# Altium PCB PCB.pcbdoc
Units mil, origin at the board's own origin, x right, y up, seen from the top; angles counter-clockwise.
Board outline 4080.9 x 3545.11 mil, 2 copper layers (Top Layer, Bottom Layer); 21 components, 67 nets, 165 pads, 18 vias.
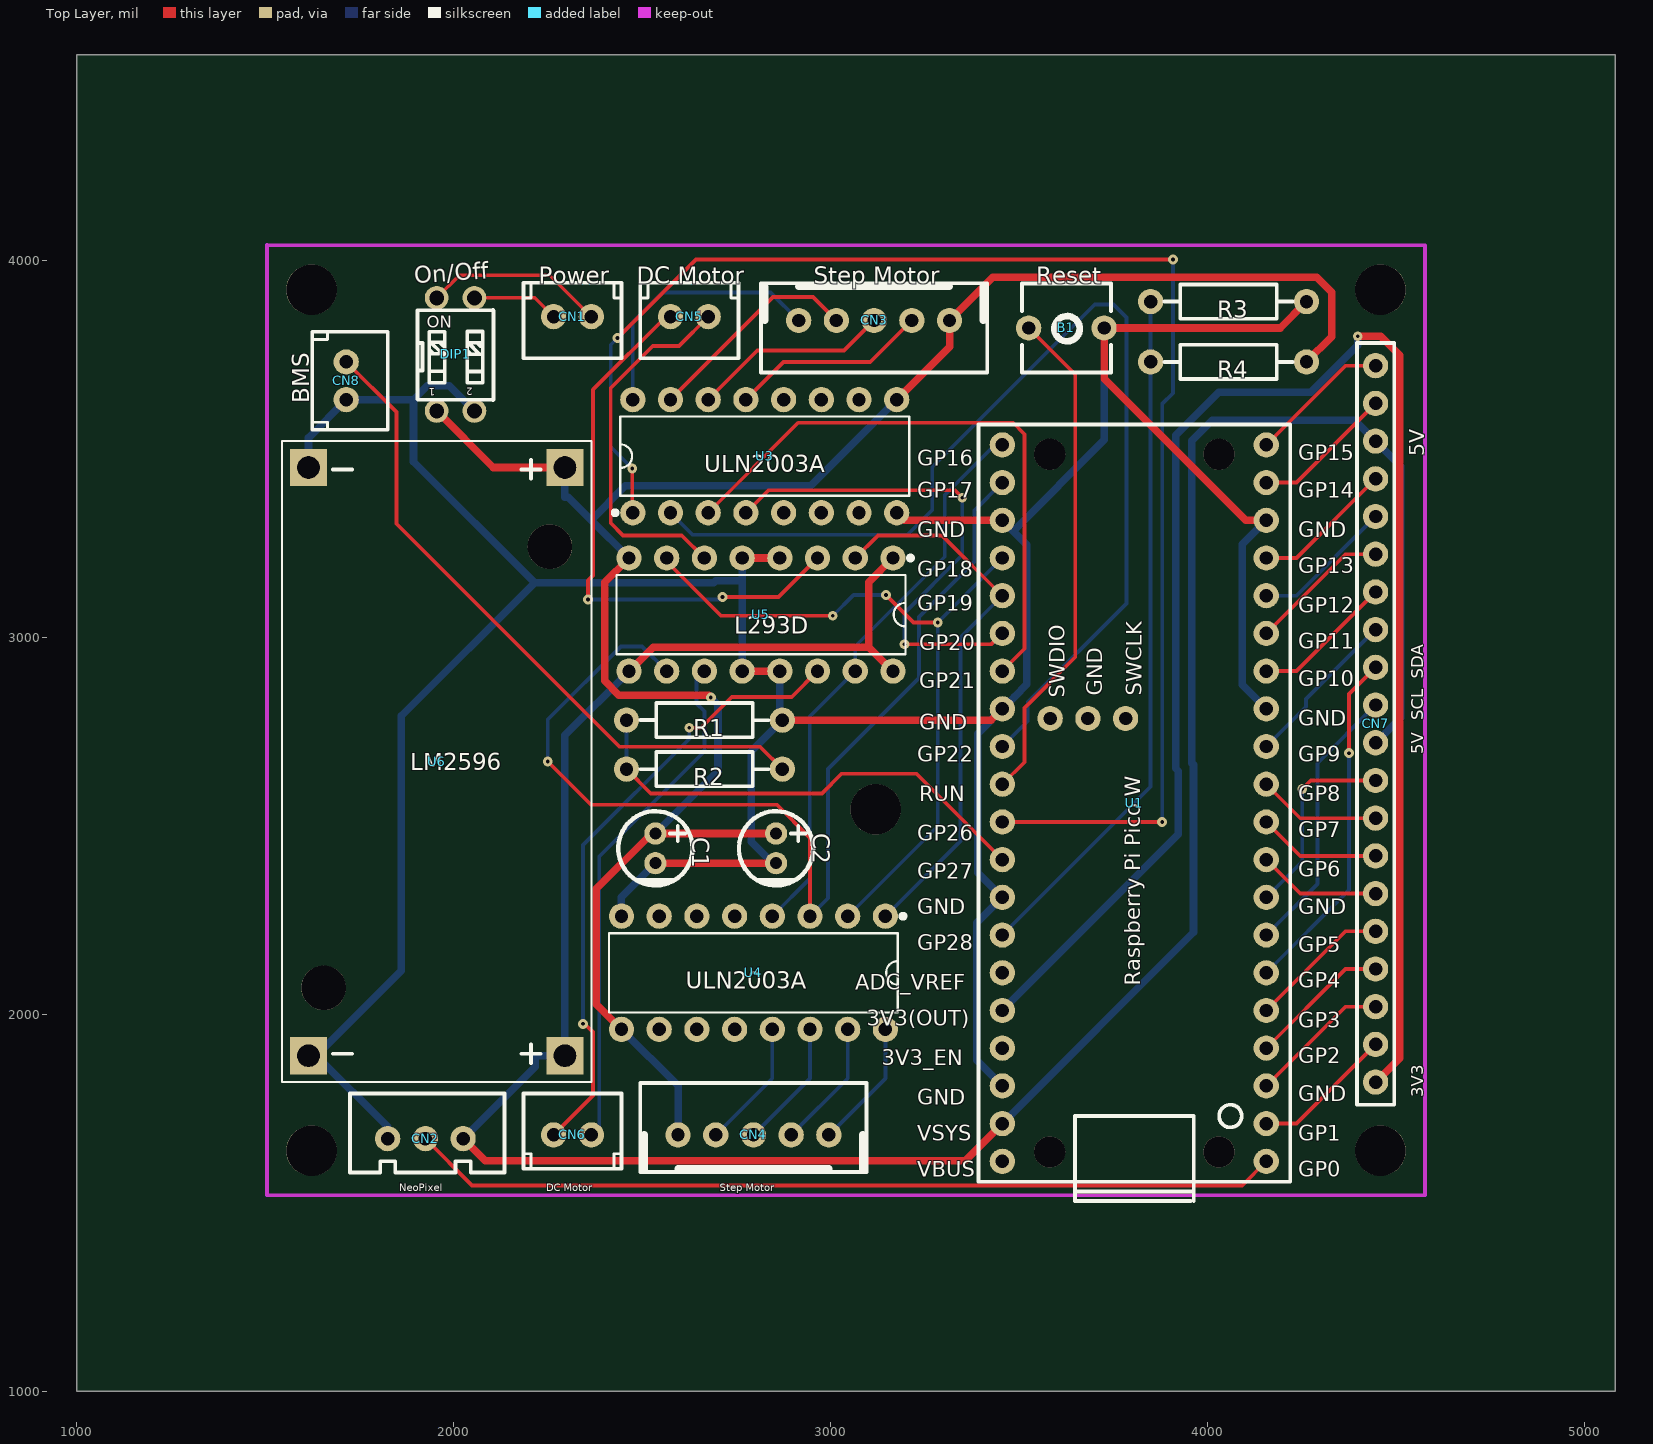
[diagram p0: Top Layer view]
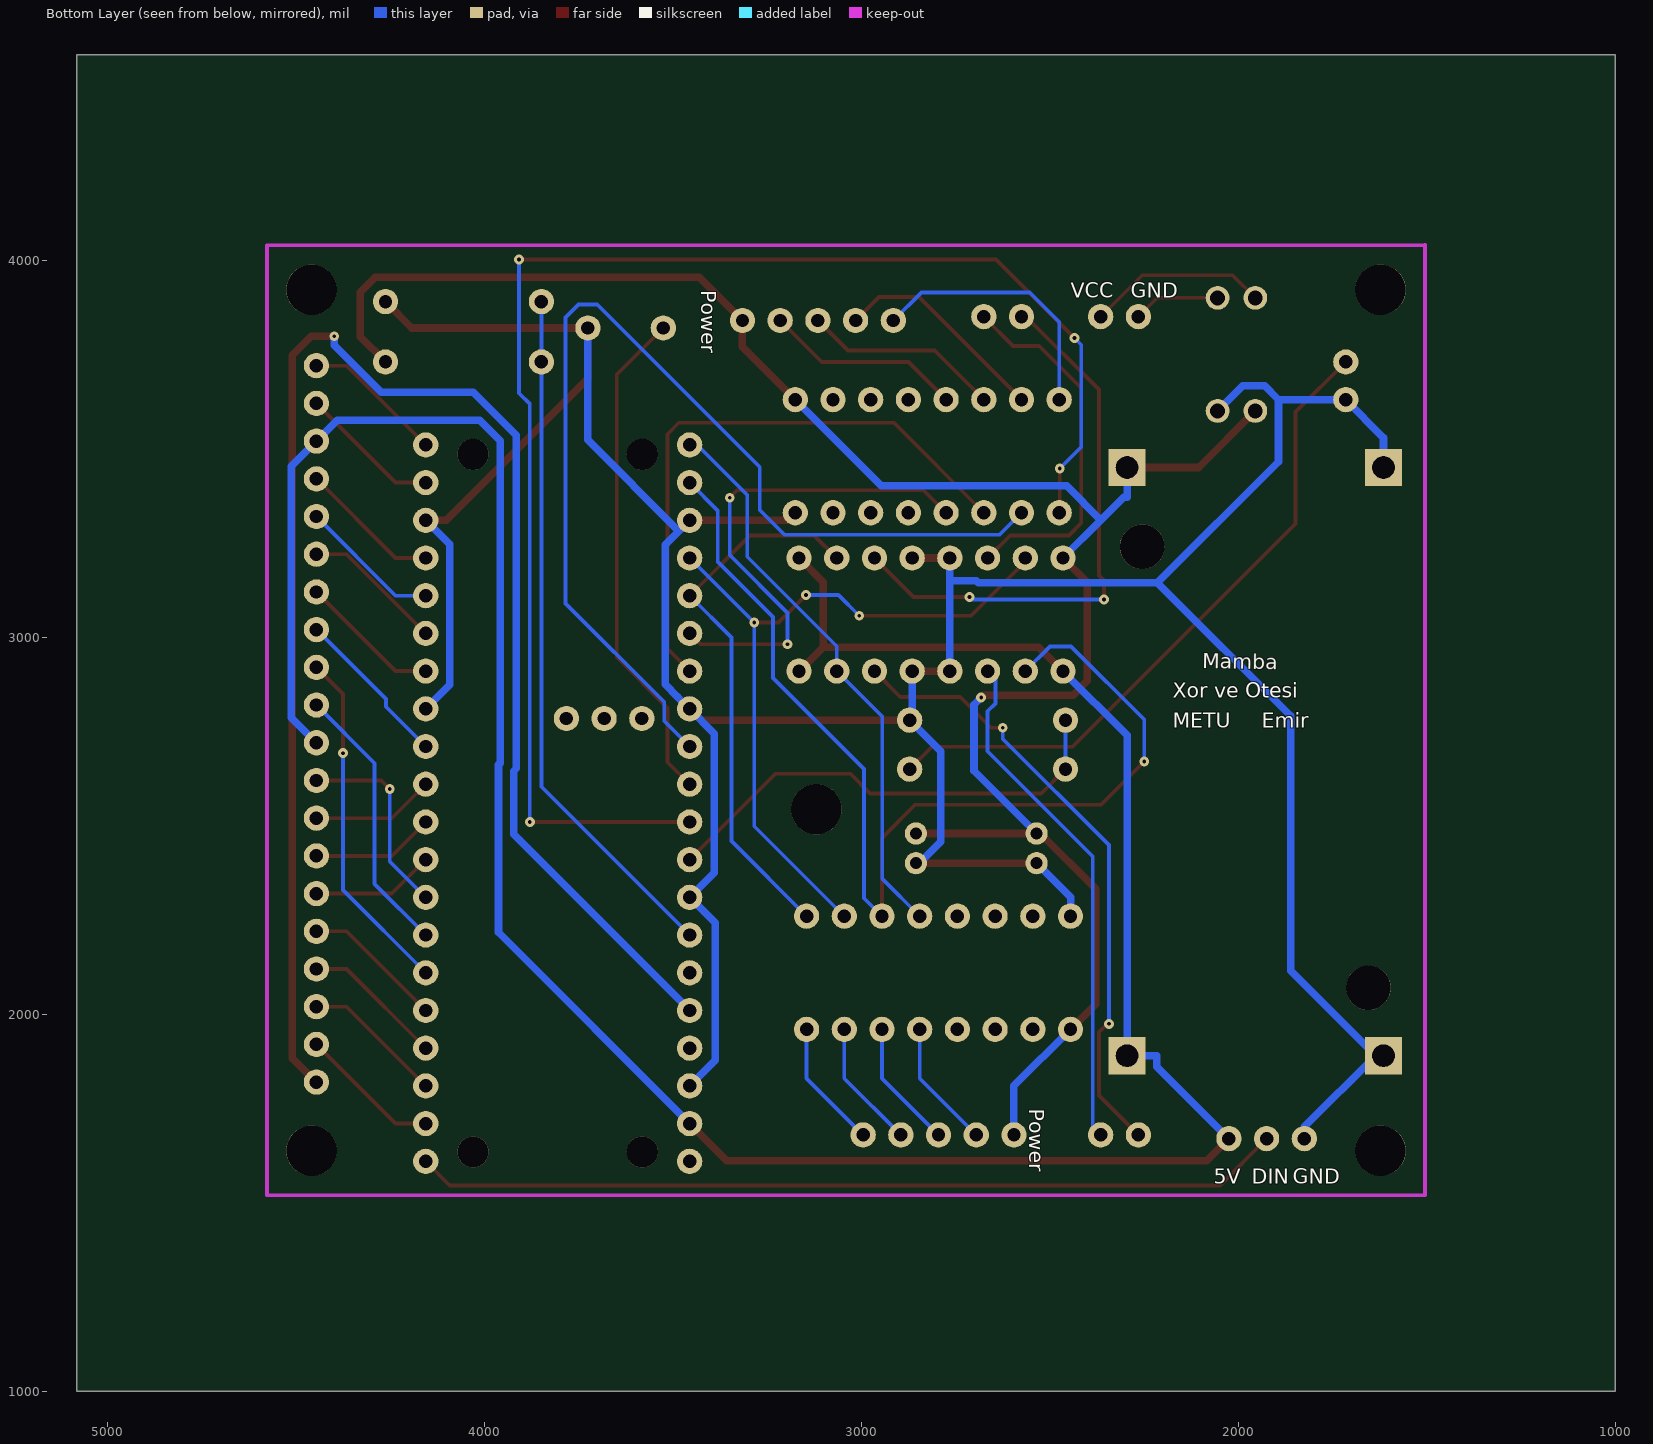
[diagram p1: Bottom Layer view, seen from below]

## Layer stack, top to bottom
Top Layer: signal copper (thickness not stored)
Dielectric: dielectric 12.6, FR-4, Dk 4.8
Bottom Layer: signal copper (thickness not stored)

## Board outline
5080.9,1000 1000,1000 1000,4545.11 5080.9,4545.11

## Components (designator, comment, footprint, x,y, rotation, side; value= is the part's Value field where it differs from the comment)
B1 "Reset" "BUTTON 2PIN" 3625,3820.11 r0 top
C1 "10uF" 10UF_16V 2535,2440.12 r270 top
C2 "10uF" 10UF_16V 2855,2440.12 r270 top
CN1 "Power" JST-XH_2P-2.54MM 2265,3850.11 r270 top
CN2 "NeoPixel" JST-XH_3_JD 1975,1670.12 r270 top
CN3 "Step Motor" "JST 2.54MM 5PIN" 3115,3840.11 r270 top
CN4 "Step Motor" "JST 2.54MM 5PIN" 2795,1680.12 r90 top
CN5 "DC Motor" JST-XH_2P-2.54MM 2575,3850.11 r270 top
CN6 "DC Motor" JST-XH_2P-2.54MM 2365,1680.12 r90 top
CN7 "Female Header 2.54 1x20" HDR-TH_20P-P2.54-V-F 4444.99,2770.11 r270 top
CN8 "BMS" JST-XH_2P-2.54MM 1715,3630.11 r0 top
DIP1 "On/Off" "DIP SWITCH 2 SWITCHES" 2005,3750.11 r0 top
R1 "10kΩ" RES-TH_BD2.3-L6.5-P10.50-D0.5 2665,2780.11 r180 top
R2 "20kΩ" RES-TH_BD2.3-L6.5-P10.50-D0.5 2665,2650.12 r0 top
R3 "10kΩ" RES-TH_BD2.3-L6.5-P10.50-D0.5 4054.99,3890.11 r180 top
R4 "20kΩ" RES-TH_BD2.3-L6.5-P10.50-D0.5 4054.99,3730.11 r0 top
U1 "Raspberry Pi Pico W" "RPI PICO-W" 3804.99,1610.12 r90 top
U3 "ULN2003A" DIP-16_L19.2-W6.6-P2.54-LS7.6-BL 2825,3480.11 r0 top
U4 "ULN2003A" DIP-16_L19.2-W6.6-P2.54-LS7.6-BL 2795,2110.12 r180 top
U5 "L293D" DIP-16_L19.2-W6.6-P2.54-LS7.6-BL 2815,3060.11 r180 top
U6 "LM2596" DC-DC-STEP-DOWN-LM2596 1955,2670.12 r270 top

## Footprints (in the part's own frame and the unit in brackets; to place one, negate y for a bottom-side part, rotate by r counter-clockwise, add the part's x,y. Pads: shape width x height; smd on the part's side, far side on the other; paste and mask are expansions set on the pad)
10UF_16V [mm]
  round 1.5 hole 0.8 paste+0 mask+0.102: 1(-1,0) 2(1,0)
  silkscreen extent -2.5,-2.5 2.56,2.5
"BUTTON 2PIN" [mm]
  round 1.7 hole 0.9 paste+0 mask+0.051: 1(-2.54,0) 2(2.54,0)
  silkscreen extent -3,-3 3,3
DC-DC-STEP-DOWN-LM2596 [mil]
  rect 98.42x98.42 hole 59.06 paste+0 mask+2: IN+(-780,340) IN-(-780,-340) OUT+(780,340) OUT-(780,-340)
  round 118.1 hole 118.1 unplated paste+0: ""(-570,300) ""(600,-300)
  silkscreen extent -850,-410 850,410
"DIP SWITCH 2 SWITCHES" [mm]
  round 1.6 hole 1 paste+0 mask+0.102: 1(-1.27,-3.81) 7(1.27,3.81) 8(-1.27,3.81)
  round 1.6 hole 1 paste+0 mask+0.051: 2(1.27,-3.81)
  silkscreen extent -2.56,-3.06 2.55,2.99
DIP-16_L19.2-W6.6-P2.54-LS7.6-BL [mm]
  round 1.7 hole 0.9 paste+0 mask+0.051: 1(-8.89,-3.81) 2(-6.35,-3.81) 3(-3.81,-3.81) 4(-1.27,-3.81) 5(1.27,-3.81) 6(3.81,-3.81) 7(6.35,-3.81) 8(8.89,-3.81) 9(8.89,3.81) 10(6.35,3.81) 11(3.81,3.81) 12(1.27,3.81) 13(-1.27,3.81) 14(-3.81,3.81) 15(-6.35,3.81) 16(-8.89,3.81)
  silkscreen extent -10.22,-3.96 9.73,2.67
HDR-TH_20P-P2.54-V-F [mm]
  round 1.7 hole 0.9 paste+0 mask+0.051: 1(-24.13,0) 2(-21.59,0) 3(-19.05,0) 4(-16.51,0) 5(-13.97,0) 6(-11.43,0) 7(-8.89,0) 8(-6.35,0) 9(-3.81,0) 10(-1.27,0) 11(1.27,0) 12(3.81,0) 13(6.35,0) 14(8.89,0) 15(11.43,0) 16(13.97,0) 17(16.51,0) 18(19.05,0) 19(21.59,0) 20(24.13,0)
  silkscreen extent -25.65,-1.25 25.65,1.25
"JST 2.54MM 5PIN" [mm]
  round 1.7 hole 0.9 paste+0 mask+0.051: 1(0,5.08) 2(0,2.54) 3(0,0) 4(0,-2.54) 5(0,-5.08)
  silkscreen extent -2.5,-7.62 3.5,7.62
JST-XH_2P-2.54MM [mm]
  round 1.7 hole 0.9 paste+0 mask+0.102: 1(0,2.54) 2(0,0)
  silkscreen extent -2.29,-2.03 2.79,4.57
JST-XH_3_JD [mm]
  round 1.7 hole 0.9 paste+0 mask+0.102: 1(0,-3.81) 2(0,-1.27) 3(0,1.27)
  silkscreen extent -3.05,-6.35 2.29,4.06
RES-TH_BD2.3-L6.5-P10.50-D0.5 [mm]
  round 1.7 hole 0.9 paste+0 mask+0.051: 1(-5.25,0) 2(5.25,0)
  silkscreen extent -4.32,-1.15 4.32,1.15
"RPI PICO-W" [mm]
  round 1.7 hole 0.9 paste+0 mask+0.102: 1(0,-8.89) 2(2.54,-8.89) 3(5.08,-8.89) 4(7.62,-8.89) 5(10.16,-8.89) 6(12.7,-8.89) 7(15.24,-8.89) 8(17.78,-8.89) 9(20.32,-8.89) 10(22.86,-8.89) 11(25.4,-8.89) 12(27.94,-8.89) 13(30.48,-8.89) 14(33.02,-8.89) 15(35.56,-8.89) 16(38.1,-8.89) 17(40.64,-8.89) 18(43.18,-8.89) 19(45.72,-8.89) 20(48.26,-8.89) 21(48.26,8.89) 24(40.64,8.89) 30(25.4,8.89) 32(20.32,8.89) 37(7.62,8.89) 41(29.83,5.664) 42(29.83,3.124) 43(29.83,0.584)
  round 1.7 hole 0.9 paste+0 mask+0.051: 22(45.72,8.89) 23(43.18,8.89) 25(38.1,8.89) 26(35.56,8.89) 27(33.02,8.89) 28(30.48,8.89) 29(27.94,8.89) 31(22.86,8.89) 33(17.78,8.89) 34(15.24,8.89) 35(12.7,8.89) 36(10.16,8.89) 38(5.08,8.89) 39(2.54,8.89) 40(0,8.89)
  round 2.1 hole 2.1 unplated paste+0: ""(0.63,5.7) ""(0.63,-5.7) ""(47.63,-5.7) ""(47.63,5.7)
  silkscreen extent -2.67,-10.5 49.63,10.5

## Free pads (board coordinates)
  round 133.86 hole 133.86 unplated paste+0: ""(1623.11,1638.23) ""(1623.11,3921.69) ""(3119.17,2543.74) ""(4457.75,1638.23) ""(4457.75,3921.69)

## Via types
v1: diameter 25.98, hole 10, Top Layer to Bottom Layer, tented both sides, 18 vias

## Nets (pads, with @x,y where several pads share a name; then routed paths per layer and width w, separated by ;. In a path a pad name is that pad's centre, name@x,y a point inside that pad or via, vN(x,y) a via of type N, cw(c..) or ccw(c..) an arc to the next point about the centre after c; other vN are vias at no path point)
3V3: CN7.20 U1.36 | length 4414.5
  Top Layer w20: v1(4397.72,3798.48) 4458.06,3798.48 4508.8,3747.74 4508.8,1883.92 CN7.20
  Bottom Layer w20: U1.36 3921.96,2477.07 3921.96,2645.08 3914.48,2652.56 3914.48,3535.66 4028.48,3649.66 4273.16,3649.66 4397.72,3774.22 v1(4397.72,3798.48)
5VDC: CN2.3 CN7.3 CN7.11 U1.39 U5.1 U5.9 U5.16 U6.OUT+ | length 7389.7
  Top Layer w20: CN2.3 2083.32,1611.79 3356.68,1611.79 U1.39 ; U5.9 2528.86,2973.99 3101.12,2973.99 ; U5.16 3101.12,2973.99 ; U5.1 3101.12,3146.25 3101.12,2973.99
  Bottom Layer w20: CN2.3 2215.78,1860.89 2215.78,1890.12 U6.OUT+ 2295,2740.13 U5.9 ; U1.39 3962.03,2217.14 3962.03,2661.67 3957.32,2666.38 3957.32,3521.11 4011.37,3575.16 4389.94,3575.16 CN7.3 4511.14,3453.96 4511.14,2786.26 CN7.11
7.4V: C1.1 C2.1 CN3.1 CN4.1 DIP1.1 R4.2 U3.9 U4.9 U5.8 U6.IN+ | length 5588.4
  Top Layer w20: DIP1.1 2105,3450.12 U6.IN+ ; U4.9 2378.22,2026.9 2378.22,2332.52 2525.19,2479.49 C1.1 C2.1 ; U5.8 2400.5,3145.63 2400.5,2884.1 2438.13,2846.47 2675.9,2846.47 v1(2682.06,2840.31) ; U3.9 3315,3770.12 CN3.1 3429.77,3954.88 4288.58,3954.88 4328.27,3915.19 4328.27,3796.7 R4.2
  Bottom Layer w20: U6.IN+ 2295,3370.9 2304.21,3370.9 2364.34,3310.78 ; U4.9 2595,1810.12 CN4.1 ; U5.8 2364.34,3310.78 ; C1.1 2700.97,2645.46 2700.97,2821.4 v1(2682.06,2840.31) ; U3.9 2946.6,3401.72 2455.28,3401.72 2364.34,3310.78
ADC1: R1.2 R2.1 U1.32 | length 1269
  Top Layer w10: R2.1 2522.53,2585.89 2976.91,2585.89 3028.7,2637.68 3227.45,2637.68 U1.32
  Bottom Layer w10: R2.1 R1.2
ADC2: R3.2 R4.1 U1.34 | length 1842.9
  Bottom Layer w10: U1.34 3848.31,2603.42 R4.1 R3.2
DIP1_7: CN1.2 DIP1.7 | length 230.7
  Top Layer w10: DIP1.7 2214.99,3900.12 CN1.2
DIP1_8: CN1.1 DIP1.8 | length 480.4
  Top Layer w10: DIP1.8 2015.01,3960.13 2254.98,3960.13 CN1.1
GND: B1.2 C1.2 C2.2 CN2.1 CN8.2 DIP1.2 R1.1 R3.1 U1.13 U1.18 U1.23 U1.28 U1.33 U1.38 U3.8 U4.8 U5.4 U5.5 U5.12 U5.13 U6.IN- U6.OUT- | length 10189.9
  Top Layer w20: C1.2@2535,2400.75 C2.2@2855,2400.75 ; U5.12 U5.13 ; U5.5 U5.4 ; R1.1 3425,2780.11 U1.28 ; U3.8 3195,3310.12 U1.23 ; U1.18 4100.93,3310.12 3725,3686.05 B1.2 4191.69,3820.11 R3.1
  Bottom Layer w20: U6.OUT- U6.OUT-@1636.13,1890.12 ; U6.IN- 1615,3489.73 1615,3529.34 1715,3629.34 CN8.2 1893.42,3630.12 ; CN2.1 1825,1701.25 U6.OUT-@1636.13,1890.12 ; DIP1.2 1988.54,3666.58 1929.88,3666.58 1893.42,3630.12 ; U4.8 2445,2310.75 C1.2@2535,2400.75 ; U5.12 2764.99,3149.46 ; U5.5 2764.99,3149.46 ; C2.2@2855,2400.75 2846.68,2400.75 2789.37,2458.06 2789.37,2697.79 R1.1 2864.99,2786.81 U5.13 ; U1.38 3387.5,1877.63 3387.5,2242.61 U1.33 3389.47,2375.66 3389.47,2744.58 U1.28 3487.37,2842.48 3487.37,2842.55 3520.14,2875.32 3520.14,3244.99 3483.51,3281.63 ; U1.23 3483.51,3281.63 ; B1.2 3725,3523.12 3483.51,3281.63 ; U1.13 4090.97,2874.16 4090.97,3246.08 U1.18 ; U6.OUT-@1636.13,1890.12 1861.46,2115.45 1861.46,2791.1 2214.86,3144.5 ; 1893.42,3630.12 1893.42,3465.94 2214.86,3144.5 ; 2214.86,3144.5 2690.05,3144.5 2695.01,3149.46 2764.99,3149.46
GP0: CN2.2 U1.1 | length 2307.8
  Top Layer w10: CN2.2 2048.91,1546.2 4091.09,1546.2 U1.1
IN1: U1.25 U4.1 U5.2 | length 1459.6
  Top Layer w10: U5.2 3124.99,3270.12 3295.01,3270.12 U1.25
  Bottom Layer w10: U4.1 3344.43,2459.55 3344.43,2999.54 U1.25
IN2: U1.24 U4.2 U5.7 | length 1961
  Top Layer w10: U5.7 2564.99,3200.43 2708.7,3056.72 v1(3005.35,3056.72) ; v1(3146.54,3112.11) 3219.61,3039.04 v1(3283.55,3039.04)
  Bottom Layer w10: v1(3005.35,3056.72) 3060.74,3112.11 v1(3146.54,3112.11) ; U4.2 3283.55,2498.67 v1(3283.55,3039.04) 3283.93,3039.04 U1.24
IN3: U1.22 U4.3 U5.10 | length 2882.3
  Top Layer w10: v1(2249.55,2670.42) 2364.39,2555.58 2857.35,2555.58 2945,2467.93 U4.3
  Bottom Layer w10: v1(2249.55,2670.42) 2249.55,2781.45 2443.57,2975.47 2499.64,2975.47 U5.10 ; U4.3 2992.68,2307.8 2992.68,2650.77 3233.84,2891.93 3233.84,3053.44 3380.85,3200.45 3380.85,3335.96 U1.22
IN4: U1.21 U4.4 U5.15 | length 1514.3
  Bottom Layer w10: U4.4 2944.04,2359.16 2944.04,2789.17 U5.15 3064.99,2976.25 3302.14,3213.4 3302.14,3377.1 3435.16,3510.12 U1.21
P+: CN8.1 R2.2 | length 1777.4
  Top Layer w10: CN8.1 1848.15,3596.97 1848.15,3301.11 2439.68,2709.58 2812.23,2709.58 R2.2
S$5201: 
SCL: CN7.10 U1.7 | length 730.1
  Bottom Layer w10: U1.7 4290.82,2345.93 4290.82,2665.94 CN7.10
SDA: CN7.9 U1.6 | length 930.1
  Top Layer w10: v1(4374.65,2692.57) 4374.65,2849.77 CN7.9
  Bottom Layer w10: U1.6 4374.65,2329.76 v1(4374.65,2692.57)
U1_2: CN7.19 U1.2 | length 377
  Top Layer w10: U1.2 4235,1710.12 CN7.19
U1_3: CN7.18 U1.3 | length 377
  Top Layer w10: U1.3 4365,2020.11 CN7.18
U1_4: CN7.17 U1.4 | length 377
  Top Layer w10: U1.4 4365,2120.11 CN7.17
U1_5: CN7.16 U1.5 | length 377
  Top Layer w10: U1.5 4365,2220.11 CN7.16
U1_8: CN7.12 U1.8 | length 530.7
  Top Layer w10: v1(4250.37,2597.28) 4273.2,2620.11 CN7.12
  Bottom Layer w10: U1.8 4250.37,2405.48 v1(4250.37,2597.28)
U1_9: CN7.15 U1.9 | length 327.3
  Top Layer w10: U1.9 4245.02,2320.11 CN7.15
U1_10: CN7.14 U1.10 | length 327.3
  Top Layer w10: U1.10 4245.02,2420.11 CN7.14
U1_11: CN7.13 U1.11 | length 327.3
  Top Layer w10: U1.11 4245.02,2520.11 CN7.13
U1_12: CN7.8 U1.12 | length 430.1
  Bottom Layer w10: U1.12 4260.74,2815.85 4260.74,2835.86 CN7.8
U1_14: CN7.7 U1.14 | length 377
  Top Layer w10: U1.14 4235,2910.12 CN7.7
U1_15: CN7.6 U1.15 | length 377
  Top Layer w10: U1.15 4365,3220.11 CN7.6
U1_16: CN7.5 U1.16 | length 377
  Bottom Layer w10: U1.16 4235,3110.12 CN7.5
U1_17: CN7.4 U1.17 | length 377
  Top Layer w10: U1.17 4235,3210.12 CN7.4
U1_19: CN7.2 U1.19 | length 377
  Top Layer w10: U1.19 4235,3410.12 CN7.2
U1_20: CN7.1 U1.20 | length 377
  Top Layer w10: U1.20 4364.99,3720.1 CN7.1
U1_26: U1.26 U3.4 | length 1329.7
  Top Layer w10: U3.4 2834.53,3389.65 3329.47,3389.65 v1(3348.99,3370.13) ; v1(3195.78,2981.63) 3426.52,2981.63 U1.26
  Bottom Layer w10: v1(3195.78,2981.63) 3195.78,3064.5 3348.99,3217.71 v1(3348.99,3370.13)
U1_27: U1.27 U3.3 | length 1603.2
  Top Layer w10: U3.3 2913.53,3568.65 3483.91,3568.65 3514.12,3538.44 3514.12,2969.23 U1.27
U1_29: U1.29 U3.2 | length 2841.4
  Bottom Layer w10: U3.2 2633.54,3271.58 3203.6,3271.58 3269.02,3337 3269.02,3451.08 3700.02,3882.08 3750.02,3882.08 3784.1,3848 3784.1,3089.63 3522.44,2827.97 3522.44,2777.55 U1.29
U1_30: B1.1 U1.30 | length 1341.2
  Top Layer w10: U1.30 3513.55,2668.66 3513.55,2812.4 3648.38,2947.23 3648.38,3696.73 B1.1
U1_31: U1.31 U3.1 | length 3982.5
  Top Layer w10: v1(2434.55,3793.82) 2642.58,4001.85 v1@3907.82,4001.85 ; v1@2473.34,3447.25 2473.34,3331.78 U3.1 ; U1.31 v1(3878.9,2510.12)
  Bottom Layer w10: v1(2434.55,3793.82) 2416.46,3775.73 2416.46,3504.13 v1@2473.34,3447.25 ; v1(3878.9,2510.12) 3878.9,3618.3 3907.82,3647.22 v1@3907.82,4001.85
  other v1: 2473.34,3447.25 3907.82,4001.85
U1_35: U1.35
U1_37: U1.37
U1_40: U1.40
U1_41: U1.41
U1_42: U1.42
U1_43: U1.43
U3_5: U3.5
U3_6: U3.6
U3_7: U3.7
U3_10: U3.10
U3_11: U3.11
U3_12: U3.12
U3_13: CN3.2 U3.13 | length 527
  Top Layer w10: U3.13 2875,3730.12 3105.01,3730.12 CN3.2
U3_14: CN3.3 U3.14 | length 527
  Top Layer w10: U3.14 2805.15,3760.27 3035.16,3760.27 CN3.3
U3_15: CN3.4 U3.15 | length 578.2
  Top Layer w10: U3.15 2846.87,3901.99 2953.12,3901.99 CN3.4
U3_16: CN3.5 U3.16 | length 709.4
  Bottom Layer w10: U3.16 2475,3836.22 2553.37,3914.59 2840.52,3914.59 CN3.5
U4_5: U4.5
U4_6: U4.6
U4_7: U4.7
U4_10: U4.10
U4_11: U4.11
U4_12: U4.12
U4_13: CN4.2 U4.13 | length 342.1
  Bottom Layer w10: CN4.2 2845,1830.12 U4.13
U4_14: CN4.3 U4.14 | length 342.1
  Bottom Layer w10: CN4.3 2945,1830.12 U4.14
U4_15: CN4.4 U4.15 | length 342.1
  Bottom Layer w10: CN4.4 3045,1830.12 U4.15
U4_16: CN4.5 U4.16 | length 342.1
  Bottom Layer w10: CN4.5 3145,1830.12 U4.16
U5_3: CN5.2 U5.3 | length 1502.1
  Top Layer w10: v1(2356.35,3100.01) 2356.35,3151.09 2369.28,3164.02 2369.28,3656.58 2562.81,3850.11 CN5.2 ; v1(2712.84,3106.4) 2861.27,3106.4 U5.3
  Bottom Layer w10: v1(2356.35,3100.01) 2706.45,3100.01 v1(2712.84,3106.4)
U5_6: CN5.1 U5.6 | length 982.4
  Top Layer w10: U5.6 2605.05,3270.06 2448.82,3270.06 2416.35,3302.53 2416.35,3661.11 2527.9,3772.66 2597.55,3772.66 CN5.1
U5_11: CN6.2 U5.11 | length 1371.6
  Bottom Layer w10: CN6.2 2386.05,1701.17 2386.05,2418.68 2664.99,2697.62 2664.99,2803.56 2644,2824.55 2644,2889.13 U5.11
U5_14: CN6.1 U5.14 | length 1656
  Top Layer w10: CN6.1 2369.29,1784.41 2369.29,1953.05 2347.71,1974.63 v1(2343.03,1974.63) ; v1(2624.54,2760.12) 2655.69,2760.12 2737.34,2841.77 2896.64,2841.77 U5.14
  Bottom Layer w10: v1(2343.03,1974.63) 2343.03,2448.84 2624.54,2730.35 v1(2624.54,2760.12)
pads on no net: U1. U6.

## Silkscreen, mask and mechanical layers (free items; w line width, h text height)
Top Overlay:
  text "5V" at 4574.68,3480.12 h39.37 r90
  text "SDA" at 4570.74,2890.12 h31.5 r90
  text "SCL" at 4570.74,2780.12 h31.5 r90
  text "5V" at 4570.74,2690.12 h31.5 r90
  text "3V3" at 4570.74,1780.12 h31.5 r90
Bottom Overlay:
  text "Power" at 3424.68,3920.11 h39.37 r90
  text "GND" at 2285,3900.42 h39.37
  text "VCC" at 2445,3900.42 h39.37
  text "Mamba" at 2095.89,2917.76 h39.37 r1
  text "Xor ve Otesi" at 2174.29,2839.01 h39.37
  text "Emir" at 1938.07,2760.27 h39.37
  text "METU" at 2174.29,2760.27 h39.37
  text "Power" at 2554.68,1750.12 h39.37 r90
  text "GND" at 1855,1550.43 h39.37
  text "DIN" at 1965,1550.43 h39.37
  text "5V" at 2065,1550.43 h39.37

## Text inside footprints (layer, text, board x,y; h text height)
DIP1: Top Overlay "1" at 1951.2,3660.76 h19.68 r180; Top Overlay "2" at 2050.7,3661.16 h19.68 r180; Top Overlay "ON" at 1928.2,3820.97 h31.5
U1: Top Overlay "GP0" at 4240.01,1569.8 h40.63; Top Overlay "GP1" at 4240.01,1664.8 h40.63; Top Overlay "GP2" at 4240.01,1869.8 h40.63; Top Overlay "GND" at 4240.01,1769.8 h40.63; Top Overlay "GP3" at 4240.01,1964.8 h40.63; Top Overlay "GP4" at 4240.01,2069.8 h40.63; Top Overlay "GP5" at 4240.01,2164.8 h40.63; Top Overlay "GND" at 4240.01,2264.8 h40.63; Top Overlay "GP6" at 4240.01,2364.8 h40.63; Top Overlay "GP7" at 4240.01,2469.8 h40.63; Top Overlay "GP8" at 4240.01,2564.8 h40.63; Top Overlay "GP9" at 4240.01,2669.8 h40.63; Top Overlay "GND" at 4240.01,2764.8 h40.63; Top Overlay "GP10" at 4240.01,2869.8 h40.63; Top Overlay "GP11" at 4240.01,2969.8 h40.63; Top Overlay "GP12" at 4240.01,3064.8 h40.63; Top Overlay "GP13" at 4240.01,3169.8 h40.63; Top Overlay "GND" at 4240.01,3264.8 h40.63; Top Overlay "GP14" at 4240.01,3369.8 h40.63; Top Overlay "GP16" at 3230.01,3454.8 h40.63; Top Overlay "GP17" at 3230.01,3369.8 h40.63; Top Overlay "GND" at 3230.01,3264.8 h40.63; Top Overlay "GP18" at 3230.01,3159.8 h40.63; Top Overlay "GP19" at 3230.01,3069.8 h40.63; Top Overlay "GP20" at 3235.01,2964.8 h40.63; Top Overlay "GP21" at 3235.01,2864.8 h40.63; Top Overlay "GND" at 3235.01,2754.8 h40.63; Top Overlay "GP22" at 3230.01,2669.8 h40.63; Top Overlay "RUN" at 3235.01,2564.8 h40.63; Top Overlay "GP26" at 3230.01,2459.8 h40.63; Top Overlay "GP27" at 3230.01,2359.8 h40.63; Top Overlay "GND" at 3230.01,2264.8 h40.63; Top Overlay "GP28" at 3230.01,2169.8 h40.63; Top Overlay "ADC_VREF" at 3065.01,2064.8 h40.63; Top Overlay "3V3(OUT)" at 3095.01,1969.8 h40.63; Top Overlay "3V3_EN" at 3135.01,1864.8 h40.63; Top Overlay "GND" at 3230.01,1759.8 h40.63; Top Overlay "VSYS" at 3230.01,1664.8 h40.63; Top Overlay "VBUS" at 3230.01,1569.8 h40.63; Top Overlay "SWCLK" at 3825.32,2845.12 h40.63 r90; Top Overlay "SWDIO" at 3620.32,2840.12 h40.63 r90; Top Overlay "GND" at 3720.32,2845.12 h40.63 r90; Top Overlay "GP15" at 4240.01,3469.8 h40.63
U6: Document "IN" at 1927,3445.12 h70 r90; Document "OUT" at 1860.5,1860.12 h70